# EAGLE board ADC_IN (EAGLE 9.3.0)
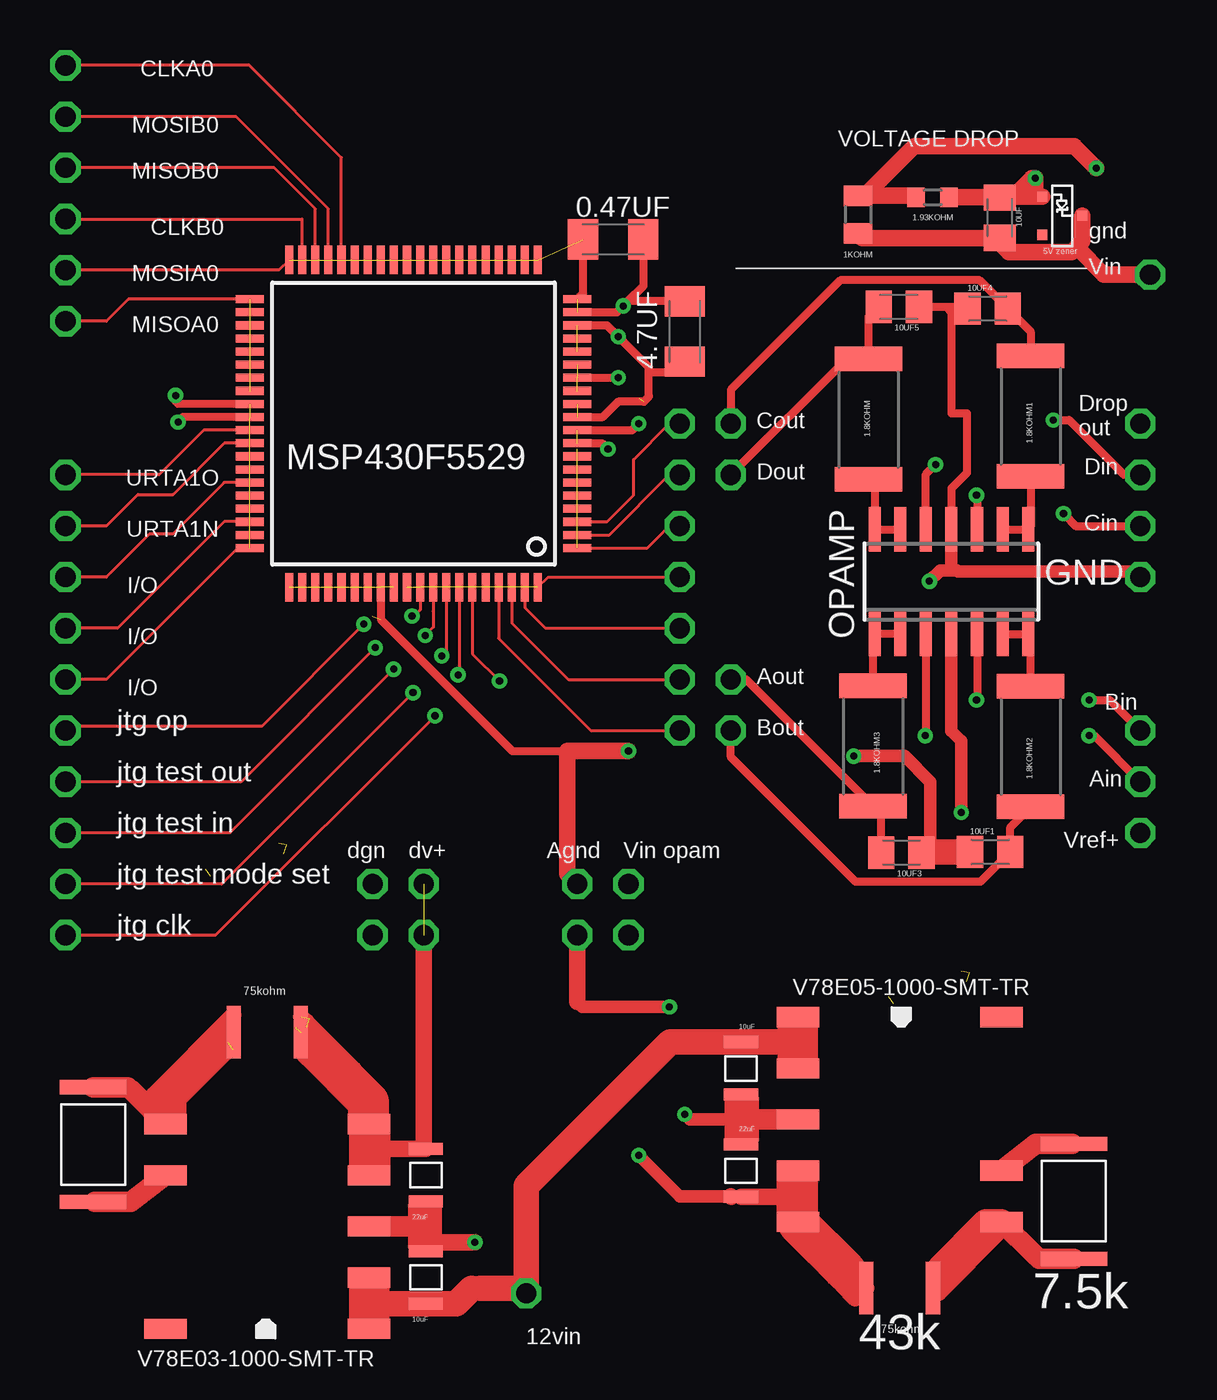
[diagram p0: board, top side]
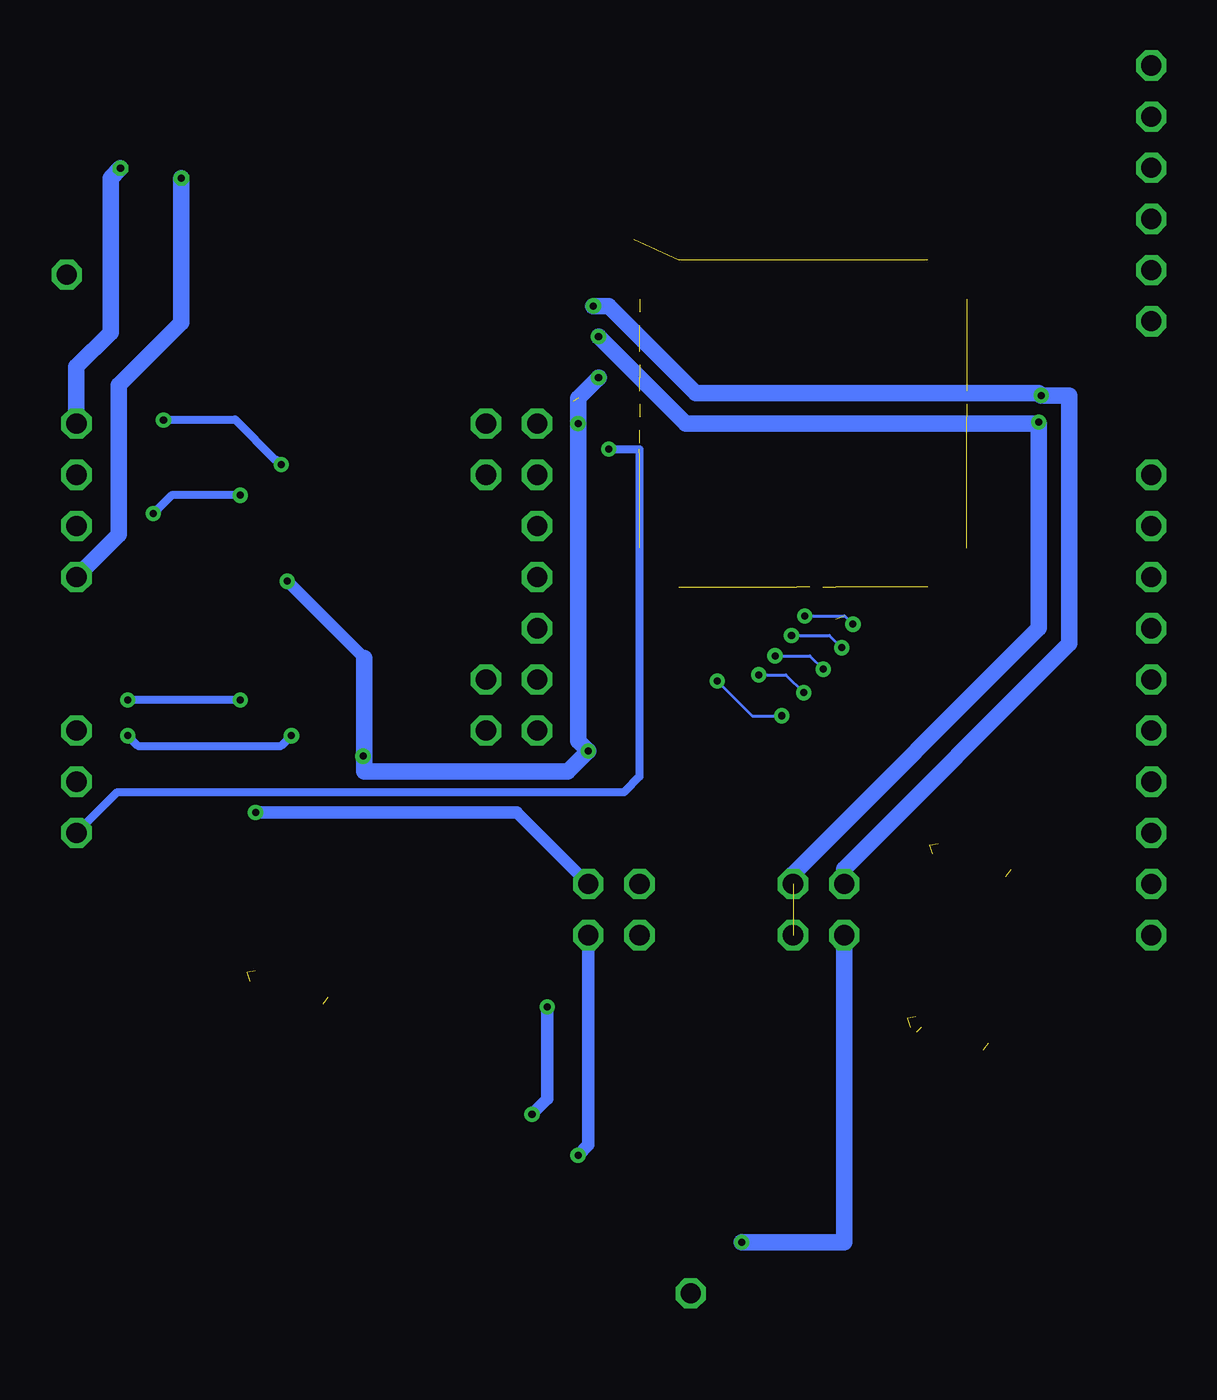
[diagram p1: board, bottom side, seen from below]

No outline drawn. Coordinates in mm, seen from the top.
Copper layers (1*16): Top 0.035mm / dielectric 1.5mm / Bottom 0.035mm
Design rules "default": minimum track width 6mil, minimum drill 0.35mm, track to track 6mil, track to pad 6mil, pad to pad 6mil, via to via 6mil, smd to smd 6mil, copper to edge 40mil, drill to drill 6mil, minimum pad ring 10mil, minimum via ring 8mil, stop-mask expansion 4mil, vias tented up to drill 0mil, thermal gap 10mil

## Footprints (pad centres in the part's own frame; a part is rotated, then mirrored left to right if it is on the bottom)
C1206K = smd 1.5 x 2: 1 -1.5,0; 2 1.5,0
R2512 = smd 1.22 x 3.35: 1 -2.99,0; 2 2.99,0
R0603 = smd 0.87 x 0.98: 1 -0.815,0; 2 0.815,0
R0805 = smd 1.02 x 1.4: 1 -0.94,0; 2 0.94,0
C0805K = smd 1.3 x 1.6: 1 -1,0; 2 1,0
PLVA650A,215 = smd 0.5 x 0.5: 1 -0.95,-2.25; 2 0.95,-2.25; 3 0,-0.25
ESR25JZPF7502 = smd 0.7 x 2.6: P$1 -1.65,-0.01; P$2 1.66,-0.01
CRGP2512F22K = smd 0.7 x 3.3: P$1 2.85,0; P$2 -2.85,0
GRT31CR61H106KE01L = smd 0.6 x 1.7: P$1 -1.3,0; P$2 1.3,0
GRT31CC81C226KE01L = smd 0.6 x 1.7: P$1 -1.3,0; P$2 1.3,0
V78E05-1000-SMT-TR = smd 1 x 2.1: GND_1 2.54,5.05; GND_2 0,-5.05; ON/OFF -5.08,5.05; VADJ 5.08,5.05; VIN_1 -5.08,-5.05; VIN_2 -2.54,-5.05; VOUT_1 2.54,-5.05; VOUT_2 5.08,-5.05
V78E03-1000-SMT-TR = smd 1 x 2.1: GND_1 2.54,5.05; GND_2 0,-5.05; ON/OFF -5.08,5.05; VADJ 5.08,5.05; VIN_1 -5.08,-5.05; VIN_2 -2.54,-5.05; VOUT_1 2.54,-5.05; VOUT_2 5.08,-5.05
QFP80_SOT496-1 = smd 0.4 x 1.4: 1 -6.175,-8.125; 2 -5.525,-8.125; 3 -4.875,-8.125; 4 -4.225,-8.125; 5 -3.575,-8.125; 6 -2.925,-8.125; 7 -2.275,-8.125; 8 -1.625,-8.125; 9 -0.975,-8.125; 10 -0.325,-8.125; 11 0.325,-8.125; 12 0.975,-8.125; 13 1.625,-8.125; 14 2.275,-8.125; 15 2.925,-8.125; 16 3.575,-8.125; 17 4.225,-8.125; 18 4.875,-8.125; 19 5.525,-8.125; 20 6.175,-8.125; 41 6.175,8.125; 42 5.525,8.125; 43 4.875,8.125; 44 4.225,8.125; 45 3.575,8.125; 46 2.925,8.125; 47 2.275,8.125; 48 1.625,8.125; 49 0.975,8.125; 50 0.325,8.125; 51 -0.325,8.125; 52 -0.975,8.125; 53 -1.625,8.125; 54 -2.275,8.125; 55 -2.925,8.125; 56 -3.575,8.125; 57 -4.225,8.125; 58 -4.875,8.125; 59 -5.525,8.125; 60 -6.175,8.125 | smd 1.4 x 0.4: 21 8.125,-6.175; 22 8.125,-5.525; 23 8.125,-4.875; 24 8.125,-4.225; 25 8.125,-3.575; 26 8.125,-2.925; 27 8.125,-2.275; 28 8.125,-1.625; 29 8.125,-0.975; 30 8.125,-0.325; 31 8.125,0.325; 32 8.125,0.975; 33 8.125,1.625; 34 8.125,2.275; 35 8.125,2.925; 36 8.125,3.575; 37 8.125,4.225; 38 8.125,4.875; 39 8.125,5.525; 40 8.125,6.175; 61 -8.125,6.175; 62 -8.125,5.525; 63 -8.125,4.875; 64 -8.125,4.225; 65 -8.125,3.575; 66 -8.125,2.925; 67 -8.125,2.275; 68 -8.125,1.625; 69 -8.125,0.975; 70 -8.125,0.325; 71 -8.125,-0.325; 72 -8.125,-0.975; 73 -8.125,-1.625; 74 -8.125,-2.275; 75 -8.125,-2.925; 76 -8.125,-3.575; 77 -8.125,-4.225; 78 -8.125,-4.875; 79 -8.125,-5.525; 80 -8.125,-6.175
SO14 = smd 0.6 x 2.2: 1 -3.81,-2.6; 2 -2.54,-2.6; 3 -1.27,-2.6; 4 0,-2.6; 5 1.27,-2.6; 6 2.54,-2.6; 7 3.81,-2.6; 8 3.81,2.6; 9 2.54,2.6; 10 1.27,2.6; 11 0,2.6; 12 -1.27,2.6; 13 -2.54,2.6; 14 -3.81,2.6

## Placement (x,y rotation side)
0.47UF  [C1206K]  -18.54,6.6 0 top
1.8KOHM  [R2512]  -5.87,-2.32 270 top
1.8KOHM1  [R2512]  2.18,-2.17 270 top
1.8KOHM2  [R2512]  2.18,-18.58 270 top
1.8KOHM3  [R2512]  -5.64,-18.55 270 top
1.93KOHM  [R0603]  -2.69,8.69 180 top
1KOHM  [R0805]  -6.39,7.83 270 top
4.7UF  [C1206K]  -14.99,2.03 90 top
10UF  [C0805K]  0.64,7.68 270 top
10UF1  [C0805K]  0.17,-23.8 0 top
10UF3  [C0805K]  -4.23,-23.85 180 top
10UF4  [C0805K]  0.04,3.17 0 top
10UF5  [C0805K]  -4.36,3.26 180 top
E$1  [PLVA650A,215]  5,7.78 270 top
E$2  [ESR25JZPF7502]  -4.32,-45.47 180 top
E$3  [CRGP2512F22K]  4.32,-41.15 90 top
E$4  [GRT31CR61H106KE01L]  -12.19,-34.54 90 top
E$5  [GRT31CC81C226KE01L]  -12.19,-39.62 90 top
E$6  [V78E05-1000-SMT-TR]  -4.32,-37.08 270 top
E$7  [V78E03-1000-SMT-TR]  -35.71,-42.39 90 top
E$8  [ESR25JZPF7502]  -35.71,-32.74 0 top
E$9  [CRGP2512F22K]  -44.35,-38.33 270 top
E$10  [GRT31CR61H106KE01L]  -27.84,-44.93 270 top
E$11  [GRT31CC81C226KE01L]  -27.84,-39.85 270 top
MSP430F5529  [QFP80_SOT496-1]  -28.45,-2.54 90 top
OPAMP  [SO14]  -1.75,-10.39 0 top

## Library data of the parts
0.47UF 4.7UF = rcl
1.8KOHM 1.8KOHM1-1.8KOHM3 1.93KOHM 1KOHM = smd-ipc
10UF 10UF1 10UF3-10UF5 MSP430F5529 = ref-packages
E$1-E$11 = Library_Capstone
OPAMP = analog-devices

## Nets
S$1: 1.8KOHM.2 OPAMP.13 OPAMP.14
S$2: 1.8KOHM1.2 OPAMP.8 OPAMP.9
S$3: 1.8KOHM2.2 10UF1.2
S$4: 1.8KOHM2.1 OPAMP.6 OPAMP.7
S$5: 1.8KOHM.1 10UF5.2
S$6: OPAMP.12
S$7: MSP430F5529.41 MSP430F5529.42 MSP430F5529.43 MSP430F5529.45 MSP430F5529.46 MSP430F5529.47 MSP430F5529.48
S$8: 0.47UF.1 0.47UF.2 1.93KOHM.1 4.7UF.1 4.7UF.2 10UF1.1 10UF3.1 10UF4.1 10UF5.1 10UF.1 E$1.1 E$7.VOUT_1 E$7.VOUT_2 E$8.P$2 E$11.P$1 MSP430F5529.1 MSP430F5529.2 MSP430F5529.3 MSP430F5529.4 MSP430F5529.5 MSP430F5529.6 MSP430F5529.7 MSP430F5529.8 MSP430F5529.9 MSP430F5529.10 MSP430F5529.11 MSP430F5529.12 MSP430F5529.13 MSP430F5529.14 MSP430F5529.15 MSP430F5529.16 MSP430F5529.17 MSP430F5529.18 MSP430F5529.19 MSP430F5529.20 MSP430F5529.21 MSP430F5529.22 MSP430F5529.23 MSP430F5529.24 MSP430F5529.25 MSP430F5529.26 MSP430F5529.27 MSP430F5529.28 MSP430F5529.29 MSP430F5529.30 MSP430F5529.31 MSP430F5529.32 MSP430F5529.33 MSP430F5529.34 MSP430F5529.35 MSP430F5529.36 MSP430F5529.37 MSP430F5529.38 MSP430F5529.39 MSP430F5529.40 MSP430F5529.49 MSP430F5529.50 MSP430F5529.51 MSP430F5529.52 MSP430F5529.53 MSP430F5529.54 MSP430F5529.55 MSP430F5529.56 MSP430F5529.57 MSP430F5529.58 MSP430F5529.59 MSP430F5529.60 MSP430F5529.61 MSP430F5529.62 MSP430F5529.63 MSP430F5529.64 MSP430F5529.65 MSP430F5529.66 MSP430F5529.67 MSP430F5529.68 MSP430F5529.69 MSP430F5529.70 MSP430F5529.71 MSP430F5529.72 MSP430F5529.73 MSP430F5529.74 MSP430F5529.75 MSP430F5529.76 MSP430F5529.77 MSP430F5529.78 MSP430F5529.79 MSP430F5529.80 OPAMP.11
S$9: 1.8KOHM3.1 OPAMP.1 OPAMP.2
S$10: 1.8KOHM1.1 10UF4.2
S$11: 1.8KOHM3.2 10UF3.2
S$12: E$4.P$1 E$5.P$2 E$6.GND_2
S$13: OPAMP.5
S$14: OPAMP.10
S$15: OPAMP.3
S$16: E$7.GND_2 E$10.P$1 E$11.P$2
S$17: 1.93KOHM.2 1KOHM.1
S$18: OPAMP.4
S$19: E$7.VADJ E$8.P$1 E$9.P$2
S$20: 1KOHM.2 10UF.2 E$1.3
S$24: E$2.P$1 E$3.P$2 E$6.VADJ
S$25: E$3.P$1 E$6.GND_1
S$26: E$7.ON/OFF
S$29: E$7.GND_1 E$9.P$1
S$30: E$4.P$2 E$6.VIN_1 E$6.VIN_2 E$7.VIN_1 E$7.VIN_2 E$10.P$2
S$32: E$2.P$2 E$5.P$1 E$6.VOUT_1 E$6.VOUT_2

## Tracks (layer width: path | path; a pad name or v marks a point on that pad's centre or on a via)
S$1
  Top 0.406: 1.8KOHM.2 -5.56,-5.62 OPAMP.14 OPAMP.13
S$2
  Top 0.406: 1.8KOHM1.2 2.18,-7.66 OPAMP.8 OPAMP.9
S$3  (via drill 1)
  Top 0.406: 1.8KOHM2.2 1.17,-22.58 10UF1.2 -0.31,-25.29 -6.51,-25.29 -12.7,-19.1 v-12.7,-17.78
S$4
  Top 0.406: 1.8KOHM2.1 2.18,-13.11 OPAMP.7 OPAMP.6
S$5  (via drill 1)
  Top 0.406: 10UF5.2 -5.87,2.75 1.8KOHM.1 -6.95,0.67 v-12.7,-5.08
S$6  (via drill 0.35, 1)
  Top 0.406: OPAMP.12 -3.02,-5.05 v-2.54,-4.57 | v3.3,-2.36 4.09,-2.36 6.81,-5.08 v7.62,-5.08
  Bottom 0.406: v-2.54,-4.57 -2.31,-4.34 -2.26,-4.34 -0.25,-2.34 3.28,-2.34 v3.3,-2.36
S$7  (via drill 1)  (6 unrouted)
  Top 0.152: MSP430F5529.41 -42.59,3.63 -43.69,2.54 v-45.72,2.54
S$8  (via drill 0.35, 1)  (70 unrouted)
  Top 0.152: -30.28,-38.55 -30.28,-39.7 E$7.VOUT_1 -31.14,-39.85 | -31.14,-37.57 -30.92,-37.57 E$7.VOUT_2 -30.66,-37.23 -30.68,-37.21 | E$11.P$1 -27.11,-38.55 | -34.31,-32.51 -33.76,-32.51 | v-45.72,-17.78 -45.52,-17.58 -35.99,-17.58 v-30.91,-12.5 | v-45.72,-20.32 -37.01,-20.32 v-30.35,-13.66 | v-28.52,-12.09 -28.42,-12.09 -28.12,-11.79 -28.12,-11.78 MSP430F5529.71 | v-45.72,-22.86 -37.57,-22.86 v-29.44,-14.73 | v-27.86,-13.06 -27.46,-12.65 -27.46,-11.86 -27.47,-11.85 MSP430F5529.72 | v-45.72,-25.4 -37.97,-25.4 v-28.47,-15.9 | v-45.72,-27.94 -38.28,-27.94 v-27.38,-17.04 | v-27.05,-14.07 -26.82,-13.84 MSP430F5529.73 | v-26.24,-15.01 -26.17,-14.95 MSP430F5529.74 | v-24.18,-15.32 -25.52,-13.97 MSP430F5529.75 | v-15.24,-17.78 -19.65,-17.78 -24.22,-13.21 MSP430F5529.77 | v-15.24,-15.24 -20.78,-15.24 -23.57,-12.44 MSP430F5529.78 | v-15.24,-12.7 -21.9,-12.7 -22.92,-11.68 MSP430F5529.79 | MSP430F5529.80 -21.77,-10.16 v-15.24,-10.16 | MSP430F5529.60 -37.16,-8.71 -43.69,-15.24 v-45.72,-15.24 | MSP430F5529.58 -37.84,-7.42 -43.13,-12.7 v-45.72,-12.7 | MSP430F5529.55 -37.84,-5.46 -40.38,-8.01 -41.53,-8.01 -43.69,-10.16 v-45.72,-10.16 | MSP430F5529.52 -37.84,-3.52 -40.38,-6.05 -42.12,-6.05 -43.69,-7.62 v-45.72,-7.62 | MSP430F5529.51 -38.86,-2.87 -41.07,-5.08 v-45.72,-5.08 | -40.39,-1.02 v-40.26,-1.14 | MSP430F5529.1 -16.84,-8.71 -15.75,-7.62 v-15.24,-7.62 | MSP430F5529.2 -18.73,-8.06 -15.75,-5.08 v-15.24,-5.08 | MSP430F5529.3 -18.84,-7.42 -17.53,-6.1 -17.53,-4.32 -15.75,-2.54 v-15.24,-2.54 | -18.3,-0.27 v-18.29,-0.25 | MSP430F5529.36 -32.02,10.66 -36.6,15.24 v-45.72,15.24 | MSP430F5529.37 -32.67,8.12 -37.25,12.7 v-45.72,12.7
  Top 0.152: MSP430F5529.38 -33.32,8.12 -35.36,10.16 v-45.72,10.16 | v-45.72,7.62 -33.97,7.62 MSP430F5529.39 | MSP430F5529.40 -35.13,5.08 v-45.72,5.08 | -16.51,0 -17.27,0.76 | 4.7UF.1 -15.52,0
  Top 0.406: -33.62,-32.08 -33.36,-33.54 | 10UF4.1 -1.04,3.26 -2.03,3.26 | 10UF5.1 -2.03,3.26 | 10UF3.1 -3.19,-23.8 -2.79,-23.8 | -2.03,3.26 -1.75,2.98 -1.75,-2.03 -0.99,-2.03 -0.99,-5 -1.75,-5.76 OPAMP.11 | -1.75,-9.55 -1.47,-9.83 -1.42,-9.88 | 10UF.1 | 7.34,-9.88 v7.62,-10.16 | -20.83,-18.8 -23.54,-18.8 -30.07,-12.27 MSP430F5529.68 | MSP430F5529.50 -39.88,-2.21 v-40.13,-2.47 | v-40.26,-1.14 -40.26,-1.44 -40.13,-1.56 MSP430F5529.49 | MSP430F5529.14 -18.3,-0.27 | v-18.29,1.78 -18.84,2.33 MSP430F5529.18 | MSP430F5529.19 -18.35,2.98 v-18.03,3.3 -17.8,3.53 | MSP430F5529.11 -19.05,-2.21 -18.29,-1.45 -17.02,-1.45 -16.76,-1.2 -16.76,0.25 v-18.29,1.78 | -17.27,0.76 v-18.29,1.78 | -15.52,0 -16.51,0 | 4.7UF.2 -17.8,3.53 | 0.47UF.1 -20.04,3.92 MSP430F5529.20 | 0.47UF.2 -17.04,4.29 -17.8,3.53 | MSP430F5529.10 -17.6,-2.87 v-17.27,-2.54 | MSP430F5529.9 -19.09,-3.52 v-18.8,-3.81
  Top 0.61: v-6.6,-19.05 -4.06,-19.05 -2.79,-20.32 -2.79,-23.8 | v-2.85,-10.36 -2.31,-9.83 -1.47,-9.83 | OPAMP.11 -1.75,-9.55 | -1.42,-9.88 7.34,-9.88
  Top 0.813: -30.28,-38.55 E$11.P$1 -27.94,-38.45 v-27.94,-27.94 | -34.03,-31.99 -31.41,-34.6 | -33.76,-32.51 -32.35,-33.92 | 1.93KOHM.1 10UF.1 | 1.04,8.76 1.08,8.73 E$1.1 2.41,8.73 v2.41,9.64 2.23,9.64 1.27,8.68 10UF.1 | v-17.78,-18.8 -20.83,-18.8 -20.83,-24.89 v-20.32,-25.4
  Top 1.016: -31.14,-39.85 -31.14,-37.57
  Top 1.27: -30.23,-39.7 -30.23,-37.75 E$7.VOUT_2 | 10UF1.1 -2.79,-23.8
  Top 2.032: -30.68,-37.21 -30.68,-36.22 -33.36,-33.54
  Bottom 0.152: v-30.91,-12.5 -30.5,-12.09 v-28.52,-12.09 | v-30.35,-13.66 -29.74,-13.06 v-27.86,-13.06 | v-29.44,-14.73 -28.78,-14.07 v-27.05,-14.07 | v-28.47,-15.9 -27.58,-15.01 v-26.24,-15.01 | v-27.38,-17.04 -25.91,-17.04 v-24.18,-15.32 | v-2.85,-10.36 -6.66,-14.17
  Bottom 0.406: -40.13,-1.02 v-40.26,-1.14 | -40.06,-2.54 v-40.13,-2.47 | v-18.8,-3.81 -20.32,-3.81 -20.32,-20.07 -19.56,-20.83 5.59,-20.83 v7.62,-22.86
  Bottom 0.61: v-2.85,-10.36 -6.6,-14.12 v-6.6,-19.05
  Bottom 0.813: v7.62,-10.16 5.51,-8.05 5.51,-0.64 2.41,2.46 v2.41,9.64 | v-18.29,-0.25 -17.27,-1.27 v-17.27,-2.54 -17.27,-18.29 v-17.78,-18.8 -16.76,-19.81 -6.66,-19.81 -6.66,-14.17 | v-18.29,1.78 -22.61,-2.54 -40.06,-2.54 -40.13,-2.54 -40.13,-12.7 -27.94,-24.89 v-27.94,-25.4 | v-18.03,3.3 -18.8,3.3 -23.11,-1.02 -40.13,-1.02 | v-40.26,-1.14 -41.66,-1.14 -41.66,-13.46 -30.48,-24.64 v-30.48,-25.4
S$9
  Top 0.406: 1.8KOHM3.1 -5.64,-13.07 OPAMP.1 OPAMP.2
S$10  (via drill 1)
  Top 0.406: 1.8KOHM1.1 2.18,2.03 10UF4.2 -0.36,4.57 -7.26,4.57 -12.7,-0.86 v-12.7,-2.54
S$11  (via drill 1)
  Top 0.406: 10UF3.2 -5.24,-21.95 1.8KOHM3.2 -11.94,-15.24 v-12.7,-15.24
S$12  (via drill 0.35, 1)
  Top 0.152: -12.5,-37.95 -12.19,-38.07 E$5.P$2 -11.97,-38.1 -11.68,-38.1 | E$4.P$1 -11.91,-35.84 -11.68,-36.07
  Top 0.203: E$4.P$1 -12.5,-36.15
  Top 0.61: -20.32,-31.24 -20.07,-31.5 v-15.75,-31.5 | v-14.99,-36.83 -14.73,-37.08 -12.5,-37.08
  Top 0.762: -11.68,-36.07 -11.68,-37.08 -11.68,-38.1
  Top 0.813: v-20.32,-27.94 -20.32,-31.24
  Top 1.016: -12.5,-36.15 -12.5,-37.08 -12.5,-37.95 | -11.68,-37.08 E$6.GND_2
  Bottom 0.61: v-15.75,-31.5 -15.75,-36.07 v-14.99,-36.83
S$13  (via drill 0.35, 1)
  Top 0.406: OPAMP.5 -0.48,-16.23 v-0.51,-16.26 | v5.08,-16.26 6.1,-16.26 v7.62,-17.78
  Bottom 0.406: v-0.51,-16.26 v5.08,-16.26
S$14  (via drill 0.35, 1)
  Top 0.406: OPAMP.10 -0.48,-6.12 v-0.51,-6.1 | v7.62,-7.62 7.59,-7.64 4.45,-7.64 v3.81,-7.01
  Bottom 0.406: v3.81,-7.01 2.9,-6.1 v-0.51,-6.1
S$15  (via drill 0.35, 1)
  Top 0.406: OPAMP.3 -3.02,-18.01 v-3.05,-18.03 | v5.08,-18.03 5.33,-18.03 v7.62,-20.32
  Bottom 0.406: v-3.05,-18.03 -2.54,-18.54 4.57,-18.54 v5.08,-18.03
S$16  (via drill 0.35, 1)
  Top 0.152: -27.53,-41.53 -27.84,-41.41 E$11.P$2 -28.06,-41.38 -28.35,-41.38 | E$10.P$1 -28.12,-43.63 -28.35,-43.41
  Top 0.203: E$10.P$1 -27.53,-43.33
  Top 0.762: -28.35,-43.41 -28.35,-42.39 -28.35,-41.38
  Top 0.813: -28.35,-42.39 -27.56,-43.18 v-25.4,-43.18
  Top 1.016: -27.53,-43.33 -27.53,-41.53 | -28.35,-42.39 E$7.GND_2
  Bottom 0.813: v-25.4,-43.18 -30.48,-43.18 v-30.48,-27.94
S$17  (via drill 0.35, 1)
  Top 0.406: 1KOHM.1 -6.04,8.77 | -3.59,8.77 1.93KOHM.2
  Top 0.813: -3.59,8.77 -6.04,8.77 -3.59,11.23 4.34,11.23 v5.44,10.13
  Bottom 0.813: v5.44,10.13 5.92,9.65 5.92,1.98 7.62,0.28 v7.62,-2.54
S$18  (via drill 0.35, 1)
  Top 0.61: OPAMP.4 -1.75,-17.8 -1.27,-18.29 v-1.27,-21.84
  Bottom 0.61: v-1.27,-21.84 -14.22,-21.84 v-17.78,-25.4
S$19  (1 unrouted)
  Top 0.152: -44.34,-35.48 E$9.P$2 | -42.63,-35.48 -42.44,-35.64 | -41.35,-37.34 -41.35,-35.86 | -37.39,-31.9 -37.39,-33.63 -37.27,-33.75
  Top 0.813: -41.35,-35.86 -37.39,-31.9 | E$7.VADJ -40.33,-36.88 -40.13,-36.88 -40.13,-36.07 -40.28,-35.92
  Top 1.016: -42.63,-35.48 -44.34,-35.48 | -42.44,-35.64 -41.22,-36.86
  Top 1.27: -41.22,-36.86 -40.28,-35.92 -37.64,-33.28
S$20  (via drill 1)
  Top 0.406: -6.17,6.68 1KOHM.2 | 10UF.2 0.64,6.41
  Top 0.813: 10UF.2 -6.17,6.68 | 0.64,6.41 1.08,5.97 4.21,5.97 4.46,6.21 | E$1.3 4.75,6.51 4.46,6.21 | 4.46,6.21 5.82,4.85 v8.1,4.85
S$22  (2 unrouted)
S$23  (1 unrouted)
S$24
  Top 0.152: 4.31,-43.99 E$3.P$2 | 2.6,-43.99 2.41,-43.84 | E$6.VADJ 0.73,-42.57 | -2.39,-45.69 -2.72,-45.69 -2.72,-44.74 -2.58,-44.61
  Top 0.254: -2.34,-44.47 -1.86,-44.95 -2.16,-44.95 E$2.P$1
  Top 0.813: 0.73,-42.57 -2.39,-45.69
  Top 1.016: 2.6,-43.99 4.31,-43.99 | 2.41,-43.84 E$6.VADJ
  Top 1.27: E$6.VADJ -0.04,-42.16 -2.34,-44.47
S$25
  Top 0.152: 4.23,-38.3 E$3.P$1
  Top 1.016: 4.23,-38.3 2.44,-38.3 E$6.GND_1
S$27  (2 unrouted)
S$28  (1 unrouted)
S$29
  Top 0.152: -44.26,-41.17 E$9.P$1
  Top 1.016: -44.26,-41.17 -42.47,-41.17 E$7.GND_1
S$30  (via drill 1)
  Top 0.152: E$7.VIN_2 -30.77,-45.05 -31.28,-45.05 -31.39,-44.93 | E$7.VIN_1 -31.39,-47.47 | -29.68,-46.23 -30.41,-46.97 | E$6.VIN_2 -9.26,-34.43 -8.75,-34.43 -8.64,-34.54 | E$6.VIN_1 -8.64,-32 | -10.35,-33.24 -9.62,-32.51
  Top 0.203: E$7.VIN_1 -30.66,-47.22 -30.41,-46.97 | E$7.VIN_2 -30.66,-45.44 -30.41,-45.44 | E$6.VIN_1 -9.37,-32.26 -9.62,-32.51 | E$6.VIN_2 -9.37,-34.04 -9.62,-34.04
  Top 0.508: -31.39,-47.47 -31.39,-44.93 | -8.64,-32 -8.64,-34.54
  Top 0.61: -10.41,-33.24 -9.62,-34.04 | -23.11,-45.47 v-22.86,-45.72
  Top 0.813: -25.55,-45.47 -25.15,-45.47
  Top 1.27: -29.68,-46.23 E$10.P$2 -26.32,-46.23 -25.55,-45.47 | -10.41,-33.24 E$4.P$2 -15.72,-33.24 -22.86,-40.39 v-22.86,-45.72 | -25.15,-45.47 -23.11,-45.47
  Top 1.524: -30.41,-46.97 -30.41,-45.44 | -9.62,-32.51 -9.62,-34.04
S$32  (via drill 0.35, 1)
  Top 0.152: -9.75,-40.92 -9.75,-39.77 E$6.VOUT_1 -8.89,-39.62 | -6.38,-45.3 -6.13,-45.3 E$2.P$2 -6.02,-45.46 | -8.89,-41.91 -9.11,-41.91 E$6.VOUT_2 -9.37,-42.24 -9.35,-42.27 | E$5.P$1 -12.67,-40.92
  Top 0.406: -6.38,-45.3 -6.5,-44.63
  Top 0.61: -12.7,-40.89 -15.24,-40.89 v-17.27,-38.86
  Top 0.813: -9.75,-40.92 E$5.P$1 | E$2.P$2 -6.52,-44.92 -7.56,-44.92 -8.6,-43.88 | -12.67,-40.92 -12.7,-40.89 | -6.02,-45.46 -6.52,-45.95 -7.17,-45.3
  Top 1.016: -6.98,-44.63 -6.5,-44.63 | -8.89,-39.62 -8.89,-41.91
  Top 1.27: -9.8,-39.78 -9.8,-41.73 E$6.VOUT_2
  Top 2.032: -6.98,-44.63 -9.35,-42.27
  Bottom 0.61: v-17.27,-38.86 -17.78,-38.35 v-17.78,-27.94

## Text on the board
tNames: CLKA0 | MOSIB0 | VOLTAGE DROP | MISOB0 | CLKB0 | gnd | MOSIA0 | ___________________________ | Vin | MISOA0 | Cout | Drop / out | URTA1O | Dout | Din | URTA1N | Cin | I/O | GND | I/O | I/O | Aout | Bin | 5V+ ? / Other connections? / Routing for breadboard ease? | jtg op | Bout | jtg test out | Ain | jtg test in | dgn | dv+ | Agnd | Vin opam | Vref+ | jtg test mode set | jtg clk | 7.5k | 12vin | 43k
Document: + | V- | outD | -inD | +inD | +inC | -inC | outC | -inB | outA | -inA | +inA | V+ | +inB | outB